# Altium PCB lk_motor_0310.PcbDoc
Units mm, origin at the board's own origin, x right, y up, seen from the top; angles counter-clockwise.
Board outline 16.3 x 14.9 mm, 2 copper layers (Top Layer, Bottom Layer); 17 components, 26 nets, 91 pads, 50 vias.
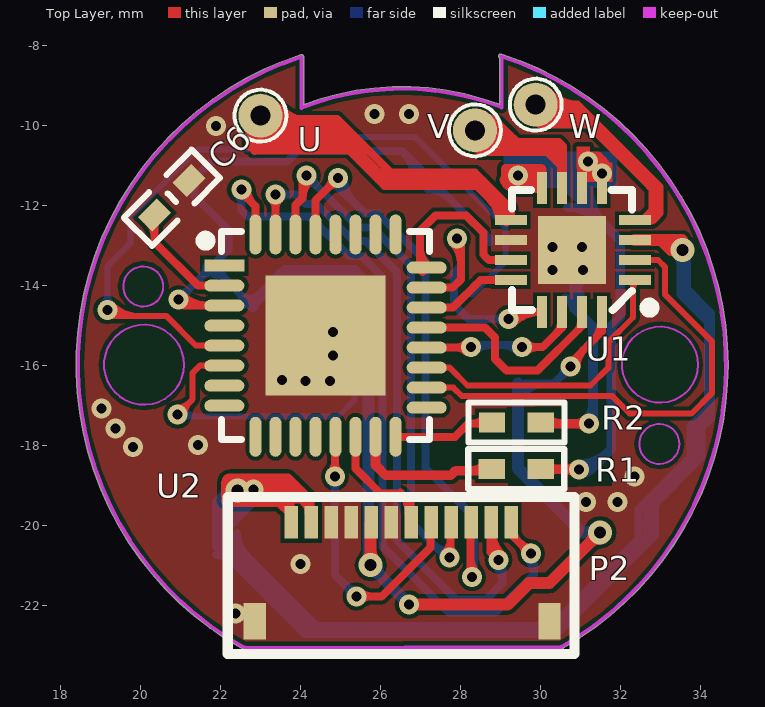
[diagram p0: Top Layer view]
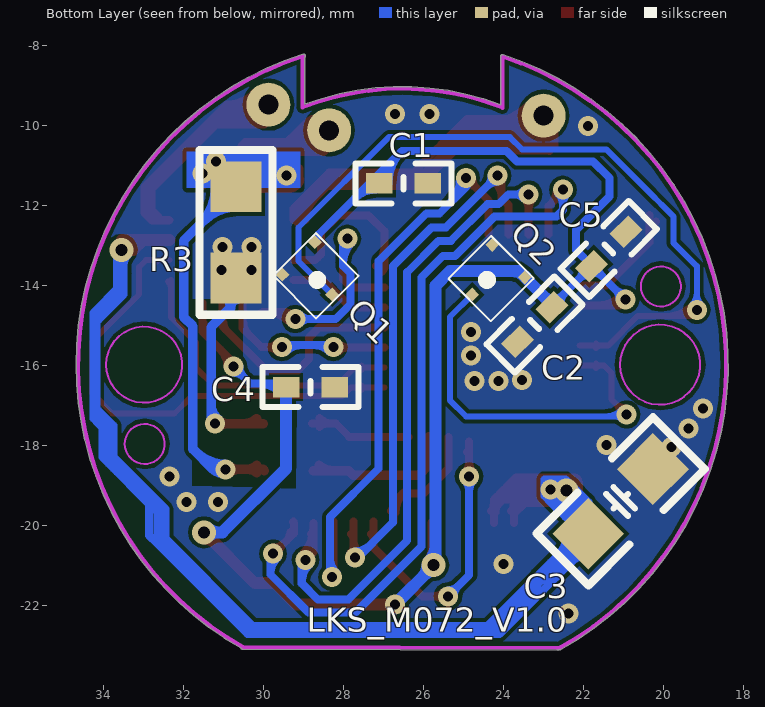
[diagram p1: Bottom Layer view, seen from below]
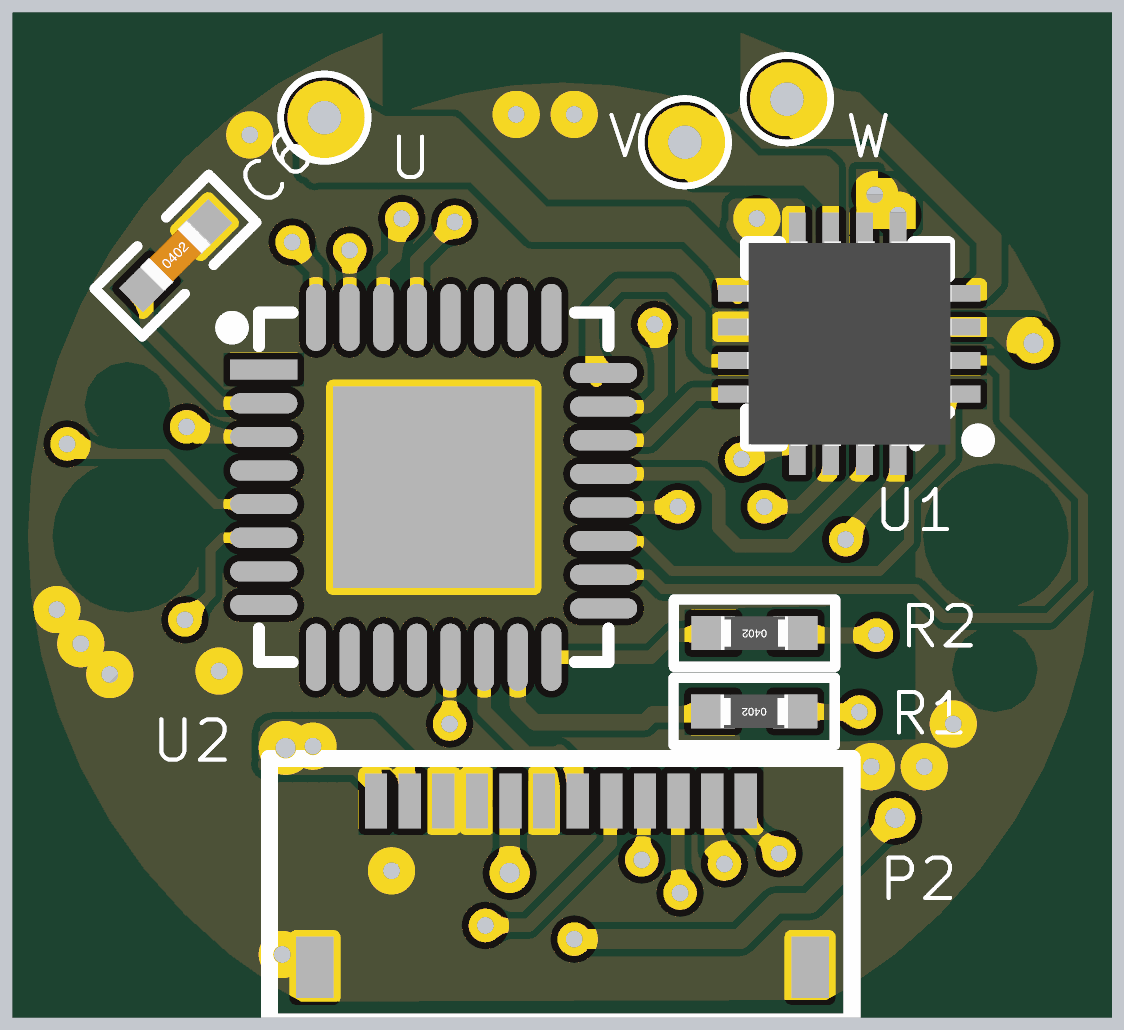
[diagram p2: 3D render of the assembled board from above, using the file's embedded part models]
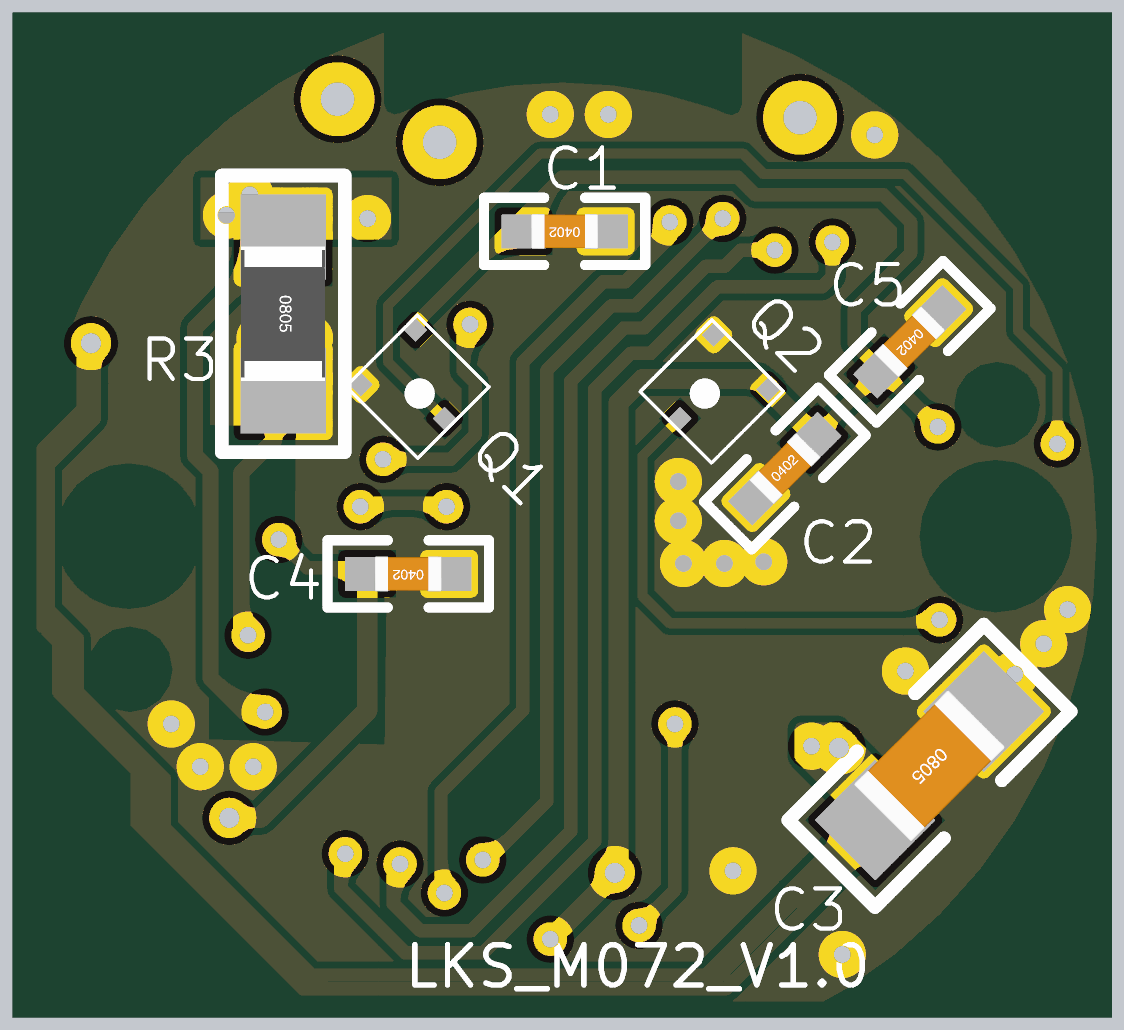
[diagram p3: 3D render of the assembled board from below, using the file's embedded part models]

## Layer stack, top to bottom
Top Solder: solder mask 0.0102, Solder Resist, Dk 3.5
Top Layer: signal copper 0.0356
Dielectric1: dielectric 0.32, FR-4, Dk 4.8
Bottom Layer: signal copper 0.0356
Bottom Solder: solder mask 0.0102, Solder Resist, Dk 3.5

## Board outline
22.576,-23.097 ccw(c22.601,-23.052) 22.621,-23.099 ccw(c22.657,-23.063) 22.657,-23.114 30.531,-23.088 ccw(c30.531,-23.038) 30.577,-23.059 ccw(c26.543,-15.977) 34.693,-15.977 ccw(c26.543,-15.977) 29.027,-8.214 ccw(c29.011,-8.262) 28.982,-8.303 28.982,-9.468 ccw(c26.543,-15.977) 24.081,-9.477 24.081,-8.276 ccw(c24.031,-8.276) 24.015,-8.228 ccw(c26.543,-15.977)

## Design rules (kind name [scope] priority, off if disabled: settings)
Clearance Clearance_2 [(InPoly)] p1: gap=0.1 ignorepadtopadclearanceinfootprint=FALSE except(0: Arc-Hole Track-Hole SMDPad-Hole THPad-Hole Via-Hole Fill-Hole Poly-Hole Region-Hole Text-Hole)
Clearance [All] p2: gap=0.1 ignorepadtopadclearanceinfootprint=FALSE except(0: Arc-Hole Track-Hole SMDPad-Hole THPad-Hole Via-Hole Fill-Hole Poly-Hole Region-Hole Text-Hole)
ComponentClearance [All] p1 off: gap=0.254 collisioncheckmode=3 verticalgap=0.127 showdistances=FALSE
FabricationTestpoint [(IsPad And (OnTopLayer Or OnBottomLayer))] p1: side=3 testpointundercomponent=TRUE minsize=1.016 maxsize=2.54 preferedsize=1.524 minholesize=0 maxholesize=1.016 preferedholesize=0.813 testpointgrid=0.025 allowsidetop=TRUE allowsidebottom=TRUE usegrid=TRUE gridtolerance=0
HoleSize [All] p1: absolutevalues=TRUE maxlimit=5.08 minlimit=0.025 maxpercent=80.000 minpercent=20.000
HoleToHoleClearance [All] p1: gap=0.127 allowstackedmicrovias=TRUE
MinimumSolderMaskSliver [All] p1 off: minsoldermaskwidth=0.127
PlaneClearance [All] p1: clearance=0.178
PolygonConnect PolygonConnect_1 [IsPad] p1: connectstyle=Direct reliefconductorwidth=0.508 reliefentries=4 polygonreliefangle="90 Angle" airgapwidth=0.254
PolygonConnect [All] p2: connectstyle=Direct reliefconductorwidth=0.508 reliefentries=4 polygonreliefangle="90 Angle" airgapwidth=0.254
RoutingVias [All] p1: holewidth=0.457 width=0.762 viastyle="Through Hole" minholewidth=0.2 minwidth=0.5 maxholewidth=1 maxwidth=2
SilkToSilkClearance [All] p1 off: silktosilkclearance=0.127
SilkToSolderMaskClearance SilkscreenOverComponentPads [IsPad] p1 off: minsilkscreentomaskgap=0.127 clearancetoexposedcopper=TRUE
SolderMaskExpansion [All] p1: expansion=0.102 istentingtop=FALSE
Width [All] p1: maxlimit=2.54 minlimit=0.127 preferedwidth=0.203
22 further rules are at their usual default settings.

## Components (designator, comment, footprint, x,y, rotation, side; value= is the part's Value field where it differs from the comment)
C1 "1uF/10V" "C 0402_M" 26.507,-11.443 r0 bottom
C2 "104F/10V" "C 0402_M" 23.231,-14.971 r135 bottom
C3 "22uF/16V" "C 0805_M" 21.079,-19.393 r315 bottom
C4 "104/10V" "C 0402_M" 28.834,-16.538 r0 bottom
C5 "10uF/10V" "C 0402_M" 21.374,-13.084 r315 bottom
C6 "100nF/50V" "C 0402_M" 20.79,-11.803 r45 top
P2 "Header 12" SMD-12 29.273,-19.916 r180 top
Q1 "MT9101DT" DFN1616 28.664,-13.855 r315 bottom locked
Q2 "MT9101DT" DFN1616 24.422,-13.855 r45 bottom locked
R1 "1K1%" "R 0402_M" 29.398,-18.583 r180 top
R2 "1K1%" "R 0402_M" 29.403,-17.419 r180 top
R3 "0.100R/0805" "R 0805_M" 30.693,-12.67 r270 bottom
U "HD" HD 23.005,-9.751 r90 top
U1 "MS39233" QFN16 30.787,-13.114 r180 top
U2 "LKS32MC072KBQ8" "QFN32 5X5_M" 24.63,-15.25 r270 top
V "HD" HD 28.367,-10.117 r90 top
W "HD" HD 29.886,-9.477 r90 top

## Footprints (in the part's own frame and the unit in brackets; to place one, negate y for a bottom-side part, rotate by r counter-clockwise, add the part's x,y. Pads: shape width x height; smd on the part's side, far side on the other; paste and mask are expansions set on the pad)
"C 0402_M" [mil] "无极性贴片电容"
  rect 26x20 smd: 1(-24,0) 2(24,0)
  silkscreen extent -47,-20 47,20, body extent -20,-10 20,10, height 21
"C 0805_M" [mil] "无极性贴片电容"
  rect 50x50 smd: 1(-45,0) 2(45,0)
  silkscreen extent -81,-36 81,36, body extent -39,-24 39,24, height 20
DFN1616 [mm]
  rect 0.25x0.25 smd: 1(-0.625,-0.711) 2(0.525,-0.711) 3(0,0.525)
  silkscreen extent -0.8,-0.85 0.7,0.66
HD [mm]
  round 1.1 hole 0.5: 1(0,0)
  silkscreen extent -0.65,-0.65 0.65,0.65
QFN16 [mm] "3mm*3mm"
  rect 0.8x0.25 smd: 1(-1.575,0.75) 2(-1.575,0.25) 3(-1.575,-0.25) 4(-1.575,-0.75) 9(1.524,-0.75) 10(1.524,-0.25) 11(1.524,0.25) 12(1.524,0.75)
  rect 0.25x0.8 smd: 5(-0.75,-1.55) 6(-0.25,-1.55) 7(0.25,-1.55) 8(0.75,-1.55) 13(0.75,1.55) 14(0.25,1.55) 15(-0.25,1.55) 16(-0.75,1.55)
  rect 1.7x1.7 smd: 17(0,0)
  silkscreen extent -2.07,-1.5 1.5,1.56, body extent -1.55,-1.52 1.49,1.52, height 0.9
"QFN32 5X5_M" [mm] "32脚，长x宽x高：5x5x0.95mm，脚距：0.5mm"
  rect 3x3 smd: 0(0,0)
  rect 0.3x1 smd: 1(-1.751,-2.528)
  oval 0.3x1 smd: 2(-1.25,-2.528) 3(-0.75,-2.528) 4(-0.25,-2.528) 5(0.25,-2.528) 6(0.75,-2.528) 7(1.25,-2.528) 8(1.75,-2.528) 17(1.8,2.528) 18(1.3,2.528) 19(0.8,2.528) 20(0.3,2.528) 21(-0.2,2.528) 22(-0.7,2.528) 23(-1.2,2.528) 24(-1.7,2.528)
  oval 1x0.3 smd: 9(2.528,-1.75) 10(2.528,-1.25) 11(2.528,-0.75) 12(2.528,-0.25) 13(2.528,0.25) 14(2.528,0.75) 15(2.528,1.25) 16(2.528,1.75) 25(-2.528,1.75) 26(-2.528,1.25) 27(-2.528,0.75) 28(-2.528,0.25) 29(-2.528,-0.25) 30(-2.528,-0.75) 31(-2.528,-1.25) 32(-2.528,-1.75)
  silkscreen extent -2.6,-3.12 2.6,2.6
"R 0402_M" [mil] "1/16W贴片电阻"
  rect 26x20 smd: 1(-24,0) 2(24,0)
  silkscreen extent -47,-20 47,20, body extent -20,-10 20,10, height 12
"R 0805_M" [mil] "1/8W贴片电阻"
  rect 50x50 smd: 1(-45,0) 2(45,0)
  silkscreen extent -81,-36 81,36, body extent -39,-25 39,25, height 20
SMD-12 [mil]
  rect 22x36 smd: 0(252.38,97.5) 0/2(-37.62,97.5)
  rect 13x32 smd: 1(216.53,0) 2(196.85,0) 3(177.17,0) 4(157.48,0) 5(137.79,0) 6(118.11,0) 7(98.43,0) 8(78.74,0) 9(59.05,0) 10(39.37,0) 11(19.68,0) 12(0,0)
  silkscreen extent -62,-25 279,130

## Part data
C1 C2 C3 C4 C5 C6: library part C, "Capacitor"
P2: "Header, 12-Pin"
R1 R2: library part Res, "Resistor"
R3: library part RES2短
U2: library part LKS32MC072KBQ82, "LKS32MC072KBQ8 / 凌鸥创芯，128KFlash，12KRAM"

## Via types
v1: diameter 0.5, hole 0.25, Top Layer to Bottom Layer, 46 vias
v2: diameter 0.6, hole 0.3, Top Layer to Bottom Layer, 4 vias

## Nets (pads, with @x,y where several pads share a name; then routed paths per layer and width w, separated by ;. In a path a pad name is that pad's centre, name@x,y a point inside that pad or via, vN(x,y) a via of type N, cw(c..) or ccw(c..) an arc to the next point about the centre after c; other vN are vias at no path point)
3.3V: C1.2 C2.2 C4.2 C5.2 P2.5 Q1.1 Q2.1 U1.16 U2.3 | length 53.5
  Top Layer w0.2: v1@20.92,-14.386 ccw(c21.194,-14.112) 21.194,-14.5 ; v1(20.955,-14.351) 21.104,-14.5 U2.3 ; v1@21.061,-14.245 ccw(c21.677,-13.629) U2.3@21.677,-14.5 ; v1(30.759,-16.027) 30.759,-15.926 31.537,-15.148 U1.16@31.537,-14.435 ; v1@30.909,-16.027 cw(c31.517,-16.027) 31.087,-15.598 ; 31.347,-15.338 ccw(c30.947,-14.939) U1.16@31.512,-14.939
  Top Layer w0.3: v2@25.655,-20.88 ccw(c25.399,-20.623) 25.761,-20.623 ccw(c26.123,-20.623) v2@25.867,-20.88 ; v2(25.761,-20.986) P2.5@25.761,-19.931 ; v1(26.721,-21.971) 29.185,-21.971 29.718,-21.438 30.226,-21.438 v2(31.496,-20.168) ; v2@31.346,-20.168 cw(c30.984,-20.168) 31.24,-20.424 cw(c31.496,-20.68) v2@31.496,-20.318
  Bottom Layer w0.2: v1(20.955,-14.351) C5.2@21.791,-13.515 ; v1@20.955,-14.201 ccw(c20.955,-13.839) 21.211,-14.095 ccw(c21.467,-14.351) v1@21.105,-14.351 ; 21.519,-13.787 cw(c21.805,-14.074) C5.2@21.805,-13.669 ; 21.552,-13.754 ccw(c21.313,-13.515) C5.2@21.651,-13.515 ; C5.2@21.859,-13.722 cw(c21.859,-14.094) 22.122,-13.831 cw(c22.385,-13.568) C5.2@22.013,-13.568 ; 22.34,-10.897 22.784,-10.897 ; 22.461,-14.171 cw(c22.147,-14.486) C2.2@22.592,-14.486 ; 22.535,-14.244 ccw(c22.746,-14.034) C2.2@22.746,-14.332 ; C2.2 22.8,-14.509 C5.2 C5.2@21.791,-13.515 ; v2@25.705,-20.955 v2@25.761,-21.011 ; 26.557,-10.646 cw(c25.761,-11.443) C1.2@26.887,-11.443 ; 26.898,-10.988 cw(c26.444,-11.443) C1.2@27.087,-11.443 ; C1.2@27.193,-11.597 cw(c27.193,-12.355) 27.729,-11.819 ; 28.615,-12.704 cw(c28.409,-12.91) Q1.1@28.7,-12.91 ; Q1.1 28.725,-12.815 26.548,-10.638 23.932,-10.638 23.673,-10.897 22.784,-10.897 ; C4.2@29.588,-16.538 C4.2@29.677,-16.449 ; C4.2@29.629,-16.647 cw(c30.106,-17.124) 30.106,-16.449 ; C4.2@29.634,-16.449 C4.2@29.677,-16.449 ; v1@30.609,-16.027 cw(c30.247,-16.027) 30.503,-16.283 cw(c30.759,-16.54) v1@30.759,-16.177 ; v1(30.759,-16.027) 30.338,-16.449 C4.2@29.677,-16.449 ; C5.2@21.791,-13.515 22.2,-13.106 22.2,-12.607 21.361,-11.769 21.361,-11.303 21.768,-10.897 22.784,-10.897
  Bottom Layer w0.3: C2.2@22.746,-14.382 ccw(c22.746,-14.036) 22.991,-14.28 ; C2.2@22.8,-14.509 22.8,-14.471 Q2.1 23.631,-13.64 25.349,-13.64 25.705,-13.995 v2@25.705,-20.955 ; Q2.1@23.459,-13.777 cw(c23.79,-14.107) 23.79,-13.64 ; 25.705,-20.488 ccw(c26.258,-20.488) v2@25.867,-20.88 ; v2@25.761,-21.136 cw(c25.761,-21.436) 25.974,-21.224 ; v2(25.761,-20.986) 25.761,-21.011 v1(26.721,-21.971) ; v2@25.911,-20.986 ccw(c26.334,-20.986) 26.035,-21.285 ; 29.444,-18.217 29.444,-17.907 ; C4.2@29.444,-16.449 29.444,-17.907 ; v2@31.39,-20.274 ccw(c31.134,-20.53) 31.134,-20.168 ccw(c31.134,-19.805) v2@31.39,-20.062 ; v2(31.496,-20.168) 31.039,-20.168 29.444,-18.572 29.444,-17.907
A_N: U1.13 U2.23 | length 9.1
  Top Layer w0.2: U2.23@26.988,-14.05 U2.23 27.809,-14.05 28.016,-13.843 28.016,-12.929 v1(27.915,-12.827) ; v1@27.809,-12.933 cw(c27.307,-13.434) 28.016,-13.434 ; v1@29.175,-14.798 cw(c29.5,-15.123) 29.5,-14.664 ; v1(29.21,-14.834) 29.286,-14.834 29.456,-14.664 U1.13 ; v1@29.316,-14.94 cw(c29.982,-15.606) U1.13@29.982,-14.664
  Bottom Layer w0.2: v1@27.809,-12.933 cw(c27.307,-13.434) 28.016,-13.434 ; v1(27.915,-12.827) 28.016,-12.929 28.016,-13.513 27.839,-13.69 27.839,-14.47 28.203,-14.834 v1(29.21,-14.834) ; v1@29.104,-14.94 ccw(c28.848,-15.196) 28.848,-14.834 ccw(c28.848,-14.471) v1@29.104,-14.728
A_P: U1.12 U2.22 | length 2.8
  Top Layer w0.2: U2.22@26.988,-14.55 U2.22 27.817,-14.55 28.503,-13.864 ; 28.334,-14.034 28.503,-13.864 ; U1.12 28.503,-13.864
B_N: U1.15 U2.21 | length 6
  Top Layer w0.2: U2.21@26.988,-15.05 U2.21 28.62,-15.05 28.868,-15.298 28.868,-15.838 29.152,-16.122 29.928,-16.122 31.037,-15.013 U1.15@31.037,-14.435 ; 30.942,-15.108 ccw(c30.773,-14.939) U1.15@31.012,-14.939
B_P: U1.14 U2.20 | length 6.7
  Top Layer w0.2: U2.20@26.988,-15.55 U2.20 28.084,-15.55 28.112,-15.578 v1@28.112,-15.64 ; 27.874,-15.55 ccw(c27.874,-15.149) v1@28.158,-15.433 ; 27.93,-15.55 cw(c27.93,-15.873) v1@28.158,-15.645 ; v1(29.546,-15.539) 30.054,-15.539 30.537,-15.056 U1.14@30.537,-14.435 ; v1@29.652,-15.645 cw(c29.908,-15.901) 29.908,-15.539 cw(c29.908,-15.177) v1@29.652,-15.433 ; 30.412,-15.181 ccw(c30.169,-14.939) U1.14@30.512,-14.939
  Bottom Layer w0.2: v1@28.213,-15.64 28.366,-15.488 29.496,-15.488 v1(29.546,-15.539) ; v1@28.37,-15.645 cw(c28.749,-16.023) 28.749,-15.488 ; 29.062,-15.488 cw(c29.062,-16.023) v1@29.44,-15.645
  other v1: 28.264,-15.539
C_N: U1.1 U2.19 | length 8
  Top Layer w0.15: U2.19@26.988,-16.05 U2.19 27.734,-16.05 28.181,-16.497 31.255,-16.497 31.699,-16.053 31.699,-15.418 32.319,-14.798 U1.1@32.319,-13.864 ; U2.19@27.562,-16.103 cw(c27.69,-16.231) 27.69,-16.05 cw(c27.69,-15.869) U2.19@27.562,-15.997 ; 32.319,-14.089 cw(c32.587,-14.089) U1.1@32.398,-13.899
C_P: U1.2 U2.18 | length 13.4
  Top Layer w0.15: U2.18@26.988,-16.55 U2.18 27.828,-16.55 28.042,-16.764 31.801,-16.764 32.233,-17.196 33.782,-17.196 34.29,-16.688 34.29,-15.392 33.122,-14.224 ; U2.18@27.562,-16.604 cw(c27.69,-16.732) 27.69,-16.55 cw(c27.69,-16.369) U2.18@27.562,-16.497 ; U1.2 32.366,-13.36 32.944,-13.36 33.122,-13.538 ; U1.2@32.673,-13.399 cw(c32.767,-13.493) 32.767,-13.36 ; 33.122,-14.072 33.122,-13.538 ; 33.274,-14.376 33.122,-14.224 ; 33.122,-14.224 33.122,-13.538
FAULT: U1.11 U2.24 | length 5
  Top Layer w0.2: U2.24@26.988,-13.55 26.988,-12.636 27.381,-12.243 28.143,-12.243 28.575,-12.675 28.575,-13.22 ; U2.24@26.988,-13.501 ccw(c27.207,-13.501) U2.24@27.052,-13.656 ; 26.988,-13.018 ccw(c27.69,-13.018) U2.24@27.194,-13.514 ; 28.645,-13.29 28.575,-13.22 ; U1.11 28.719,-13.364 28.575,-13.22
GND: C1.1 C2.1 C3.1 C4.1 C5.1 C6.2 P2.0 P2.0/2 P2.3 P2.4 P2.6 Q1.2 Q2.2 R2.1 R3.2 U1.10 U1.17 U2.0 | length 8.6
  Top Layer w0.24: R2.1@30.013,-17.452 31.214,-17.452 v1(31.217,-17.45) ; R2.1@30.184,-17.325 ccw(c30.492,-17.016) 30.492,-17.452 ; 30.897,-17.452 ccw(c30.897,-17.13) v1@31.125,-17.358 ; 30.909,-17.452 cw(c30.909,-17.758) v1@31.125,-17.542
  Bottom Layer w0.24: R3.2@30.622,-14.323 cw(c30.589,-14.565) 30.833,-14.565 cw(c31.26,-14.565) R3.2@31.003,-14.224 ; 30.833,-14.486 cw(c31.936,-14.486) R3.2@31.156,-13.706 ; R3.2@30.833,-13.907 cw(c31.357,-13.907) R3.2@30.986,-13.537 ; R3.2@30.833,-13.589 30.833,-14.552 31.318,-15.037 31.318,-16.967 ; v1@31.135,-17.348 ccw(c30.83,-16.967) 31.318,-16.967 ; v1(31.217,-17.45) 31.318,-17.348 31.318,-16.967
  other v1: 22.377,-22.2 24.003,-20.955 31.14,-19.406 31.928,-19.406 32.36,-18.771 19.812,-18.034 21.438,-17.983 19.38,-17.577 19.025,-17.069 24.13,-16.383 24.74,-16.383 23.546,-16.358 24.816,-15.748 24.816,-15.164 30.302,-13.614 31.064,-13.614 30.302,-13.03 31.039,-13.03 21.895,-10.008 25.857,-9.703 26.721,-9.703
LH_OUT_0: Q1.3 U2.5 | length 21.8
  Top Layer w0.15: v1(19.177,-14.605) 19.329,-14.757 20.65,-14.757 21.393,-15.5 U2.5 ; v1@19.195,-14.587 ccw(c19.605,-14.177) 19.605,-14.757 ; v1@19.301,-14.481 ccw(c19.967,-13.815) 19.967,-14.757 ; U2.5@21.699,-15.553 ccw(c21.571,-15.681) 21.571,-15.5 ccw(c21.571,-15.319) U2.5@21.699,-15.447
  Bottom Layer w0.15: v1@19.053,-14.481 ccw(c18.755,-14.183) 19.177,-14.183 ccw(c19.599,-14.183) v1@19.301,-14.481 ; v1(19.177,-14.605) 19.177,-13.818 19.177,-13.513 19.761,-12.929 19.761,-12.268 20.396,-11.633 20.218,-11.811 21.285,-10.744 ; 21.228,-10.801 21.438,-10.592 23.546,-10.592 23.851,-10.287 26.873,-10.287 29.134,-12.548 29.134,-13.386 Q1.3
LH_OUT_1: Q2.3 U2.6 | length 11.3
  Top Layer w0.15: v1@20.879,-17.272 21.311,-16.84 21.311,-16.18 21.49,-16 U2.6 ; v1@20.93,-17.046 ccw(c20.93,-16.624) 21.228,-16.922 ccw(c21.527,-17.221) v1@21.105,-17.221 ; U2.6@21.699,-16.053 ccw(c21.571,-16.181) 21.571,-16 ccw(c21.571,-15.819) U2.6@21.699,-15.947
  Bottom Layer w0.15: v1@20.879,-17.272 24.943,-17.272 25.349,-16.866 25.349,-14.783 Q2.3 ; v1@21.053,-17.345 cw(c21.229,-17.521) 21.229,-17.272 ; v1@21.053,-17.097 ccw(c21.475,-16.676) 21.475,-17.272
  other v1: 20.93,-17.221
NRST: C6.1 U2.2 | length 3.3
  Top Layer w0.2: C6.1@20.196,-12.397 cw(c19.803,-12.79) 20.359,-12.79 ; C6.1 20.359,-12.917 21.442,-14 U2.2
OC: U2.12
OPA3_IN: R2.2 U2.16 | length 3.1
  Top Layer w0.2: U2.16 27.866,-17.778 28.191,-17.452 R2.2@28.793,-17.452 ; 28.266,-17.452 ccw(c28.266,-16.968) R2.2@28.608,-17.31 ; 28.425,-17.452 cw(c28.425,-17.711) R2.2@28.608,-17.528
OPA3_IP: R1.2 U2.15 | length 4.1
  Top Layer w0.24: U2.15 25.881,-18.489 26.137,-18.745 27.762,-18.745 27.882,-18.626 R1.2@28.768,-18.626 ; 28.284,-18.626 ccw(c28.284,-18.155) R1.2@28.617,-18.488
PGND: R1.1 R3.1 U1.5 U1.6 U1.8 | length 27.1
  Top Layer w0.24: 29.104,-11.355 ccw(c29.387,-11.268) 29.387,-11.564 ; v1@29.333,-11.285 ccw(c29.712,-11.168) 29.712,-11.564 ; v1@29.439,-11.142 cw(c29.439,-11.568) 29.74,-11.267 ; v1@29.506,-11.074 cw(c29.506,-11.821) 30.034,-11.293 ccw(c29.541,-11.785) v1@29.541,-11.089 ; v1@29.541,-11.332 cw(c30.037,-11.717) 30.037,-11.089 ; v1@29.546,-11.326 cw(c30.023,-11.653) 30.023,-11.074 ; v1@29.563,-11.214 ccw(c30.037,-11.068) U1.8 ; v1@29.649,-11.176 U1.8 ; 29.82,-11.176 30.037,-11.394 U1.8 ; 29.872,-11.228 ccw(c30.012,-11.088) U1.8@30.037,-11.284 ; R1.1@29.987,-18.626 30.02,-18.593 v1(30.963,-18.593) ; R1.1@30.179,-18.677 cw(c30.383,-18.882) 30.383,-18.593 ; R1.1@30.179,-18.488 ccw(c30.432,-18.235) 30.432,-18.593 ; v1@30.871,-18.685 ccw(c30.649,-18.907) 30.649,-18.593 ccw(c30.649,-18.279) v1@30.871,-18.501 ; U1.6@31.037,-11.51 cw(c31.713,-11.51) v1@31.275,-10.996 ; U1.6@31.037,-11.491 31.037,-10.873 31.14,-10.77 31.445,-10.77 31.537,-10.862 U1.5@31.537,-11.491 ; 31.555,-10.88 cw(c31.306,-11.129) U1.5@31.642,-11.234 ; 29.134,-11.074 30.023,-11.074 ; 29.134,-11.074 29.148,-11.089 v1@29.424,-11.089 ; 29.134,-11.074 29.134,-11.303 29.395,-11.564 ; v1@29.337,-11.176 v1@29.424,-11.089 ; v1@29.337,-11.176 29.312,-11.176 29.312,-11.481 29.395,-11.564 ; v1@29.337,-11.176 29.725,-11.564 U1.8 ; 29.395,-11.564 U1.8 ; v1@29.424,-11.089 30.037,-11.089 ; 30.023,-11.074 30.037,-11.089 ; U1.8 30.037,-11.089
  Bottom Layer w0.24: R3.1@30.653,-11.527 32.004,-12.878 32.004,-14.783 31.775,-15.011 31.775,-18.085 31.267,-18.593 v1(30.963,-18.593) ; R3.1@30.693,-12.042 cw(c30.693,-13.187) 31.503,-12.377 ; v1@30.963,-18.703 ccw(c30.963,-18.233) 31.295,-18.565 ; v1@30.963,-18.463 ccw(c30.963,-17.413) 31.705,-18.155 ; R3.1@30.968,-11.527 ccw(c31.73,-11.527) R3.1@31.192,-12.065 ; R3.1@31.208,-11.527 ccw(c32.55,-11.527) 31.601,-12.475
  other v1: 29.439,-11.252 31.537,-11.201 31.191,-10.897
RXD0: P2.8 U2.13 | length 9.8
  Top Layer w0.2: v1@24.761,-18.665 ccw(c24.504,-18.408) 24.867,-18.408 ccw(c25.229,-18.408) v1@24.973,-18.665 ; v1@24.816,-18.72 v1(24.867,-18.771) U2.13@24.867,-17.894 ; 24.867,-18.282 cw(c25.035,-18.282) U2.13@24.916,-18.164 ; v1(25.4,-21.768) 26.035,-21.768 27.258,-20.545 P2.8@27.258,-19.896 ; v1@25.506,-21.874 cw(c25.762,-22.13) 25.762,-21.768 cw(c25.762,-21.406) v1@25.506,-21.662 ; 27.258,-20.351 cw(c27.467,-20.351) P2.8@27.32,-20.203
  Bottom Layer w0.2: v1@24.761,-18.877 cw(c24.504,-19.133) 24.867,-19.133 cw(c25.229,-19.133) v1@24.973,-18.877 ; v1(24.867,-18.771) 24.867,-21.234 v1(25.4,-21.768) ; v1@25.25,-21.768 ccw(c24.888,-21.768) 25.144,-21.512 ccw(c25.4,-21.256) v1@25.4,-21.618
SWCLK: P2.11 U2.31 | length 19.8
  Top Layer w0.2: v1@23.274,-11.828 cw(c23.018,-12.084) 23.38,-12.084 cw(c23.742,-12.084) v1@23.486,-11.828 ; U2.31 v1(23.38,-11.721) ; 28.758,-20.497 ccw(c29.313,-20.497) v1@28.921,-20.889 ; 28.758,-20.351 cw(c28.967,-20.351) P2.11@28.82,-20.203 ; P2.11@28.758,-20.014 ccw(c29.796,-20.014) v1@29.062,-20.747 ; P2.11@28.758,-19.931 28.758,-20.656 v1(28.956,-20.853)
  Bottom Layer w0.2: v1@23.456,-11.645 v1(23.38,-11.721) 23.888,-11.721 24.13,-11.963 24.409,-11.963 25.326,-12.88 25.63,-12.88 26.416,-13.665 26.416,-20.371 27.889,-21.844 28.651,-21.844 29.058,-21.438 29.058,-20.955 v1(28.956,-20.853) ; v1@23.486,-11.828 cw(c23.742,-12.084) 23.742,-11.721 cw(c23.742,-11.359) v1@23.486,-11.615 ; v1@28.852,-20.961 cw(c28.383,-21.446) 29.058,-21.446
SWDIO: P2.12 U2.32 | length 22.2
  Top Layer w0.2: v1@22.524,-11.752 cw(c22.524,-11.979) 22.684,-11.819 ; v1@22.524,-11.526 v1(22.524,-11.602) 22.524,-11.659 22.88,-12.014 U2.32 ; v1@22.674,-11.602 ccw(c23.172,-11.602) 22.82,-11.954 ; P2.12@29.251,-19.931 29.251,-20.193 29.759,-20.701 v1(29.769,-20.701) ; P2.12@29.258,-19.896 P2.12@29.272,-19.91 ; P2.12@29.339,-20.157 ccw(c29.637,-20.157) 29.426,-20.368 ; 29.495,-20.438 ccw(c29.769,-20.164) v1@29.769,-20.551 ; 29.52,-20.462 cw(c29.281,-20.701) v1@29.619,-20.701
  Bottom Layer w0.2: v1@22.418,-11.708 cw(c22.162,-11.964) 22.524,-11.964 cw(c22.886,-11.964) v1@22.63,-11.708 ; v1@22.601,-11.526 v1@22.575,-11.526 ; 23.216,-12.268 23.52,-12.268 ; v1@29.664,-20.808 cw(c29.259,-21.221) 29.837,-21.221 ; v1(29.769,-20.701) 29.837,-20.77 29.837,-21.217 28.88,-22.174 27.711,-22.174 26.06,-20.523 26.06,-13.792 25.527,-13.259 25.222,-13.259 24.232,-12.268 23.52,-12.268 ; v1@22.524,-11.577 22.524,-11.526 v1@22.575,-11.526 ; v1@22.524,-11.577 v1(22.524,-11.602) 22.524,-12.11 22.682,-12.268 23.52,-12.268 ; v1@22.524,-11.577 v1@22.575,-11.526
TIM1_CH0: P2.10 U2.29 | length 17.6
  Top Layer w0.2: U2.29 24.38,-11.865 v1(24.943,-11.303) ; v1@24.793,-11.303 cw(c24.431,-11.303) 24.687,-11.559 cw(c24.943,-11.815) v1@24.943,-11.453 ; v1@28.19,-21.179 ccw(c28.017,-21.007) 28.261,-21.007 ; P2.10@28.258,-19.896 28.26,-19.931 P2.10@28.261,-19.939 ; 28.261,-20.839 ccw(c28.742,-20.839) v1@28.402,-21.179 ; 28.261,-20.345 cw(c28.461,-20.345) P2.10@28.32,-20.203 ; P2.10@28.261,-19.931 P2.10@28.261,-19.939 ; v1@28.346,-21.387 28.261,-21.301 P2.10@28.261,-19.939
  Bottom Layer w0.2: v1@24.893,-11.303 ccw(c25.324,-11.303) 25.019,-11.608 ; v1@24.93,-11.316 24.93,-11.519 25.604,-12.193 25.934,-12.193 27.127,-13.386 27.127,-18.567 28.346,-19.787 v1@28.346,-21.387 ; v1@25.093,-11.303 ccw(c26.007,-11.303) 25.361,-11.949 ; v1@28.19,-21.179 ccw(c27.811,-20.8) 28.346,-20.8
  other v1: 28.296,-21.285
TIM1_CH1: P2.9 U2.30 | length 16.3
  Top Layer w0.2: U2.30 23.88,-11.985 24.054,-11.811 24.054,-11.354 v1(24.155,-11.252) ; v1@24.038,-11.167 24.045,-11.167 v1@24.054,-11.176 ; 24.054,-11.82 cw(c24.671,-11.82) v1@24.256,-11.363 ; v1@27.619,-20.687 ccw(c27.284,-20.351) 27.758,-20.351 cw(c27.967,-20.351) P2.9@27.82,-20.203 ; v1@27.758,-20.879 P2.9@27.758,-19.896 ; 27.758,-20.51 ccw(c28.008,-20.51) v1@27.831,-20.687
  Bottom Layer w0.2: v1@24.155,-11.402 cw(c24.155,-11.764) 24.411,-11.508 cw(c24.668,-11.252) v1@24.305,-11.252 ; v1(24.155,-11.252) 25.451,-12.548 25.806,-12.548 25.819,-12.56 26.772,-13.513 26.772,-19.918 27.774,-20.92 27.801,-20.92 27.813,-20.908 v1@27.813,-20.879 ; 27.335,-20.481 ccw(c27.725,-20.091) v1@27.725,-20.643
  other v1: 27.725,-20.793
TXD0: P2.7 U2.14 | length 4.1
  Top Layer w0.2: U2.14 25.381,-18.573 26.01,-19.202 26.53,-19.202 26.758,-19.431 P2.7@26.758,-19.896 ; 26.501,-19.173 cw(c25.999,-19.675) P2.7@26.708,-19.675 ; 26.644,-19.317 cw(c26.424,-19.536) P2.7@26.713,-19.651 ; 26.758,-19.481 ccw(c26.967,-19.481) P2.7@26.82,-19.629
U: U1.9 U.1 | length 51.7
  Top Layer w0.2: U.1@22.687,-10.069 cw(c22.268,-10.488) 22.86,-10.488 ; 22.733,-10.539 cw(c23.073,-10.539) U.1@23.044,-10.199 ; 22.733,-10.32 cw(c23.054,-10.32) U.1@23.027,-10 ; U.1@22.802,-10.153 cw(c22.635,-10.483) 23.005,-10.483 cw(c23.374,-10.483) U.1@23.208,-10.153 ; 22.86,-10.629 cw(c23.356,-10.629) U.1@23.172,-10.169 ; 22.86,-10.334 cw(c23.238,-10.334) U.1@23.098,-9.983 ; U.1@22.899,-9.857 ccw(c23.599,-9.157) 23.599,-10.147 ; U.1@23.379,-10.001 cw(c23.698,-10.213) 23.698,-9.83 ; U.1@23.416,-9.933 cw(c23.696,-10.056) 23.696,-9.751 ; U.1@23.416,-9.569 ccw(c23.696,-9.446) 23.696,-9.751 ; U.1@23.439,-9.632 ccw(c23.698,-9.561) 23.698,-9.83 ; 23.745,-10.008 cw(c23.745,-9.011) 23.04,-9.716 ccw(c24.082,-8.674) 24.082,-10.147 ; 24.228,-10.008 cw(c24.228,-8.528) 23.182,-9.574 ccw(c24.565,-8.191) 24.565,-10.147 ; 24.711,-10.008 cw(c24.711,-8.045) 23.323,-9.433 ccw(c25.048,-7.708) 25.048,-10.147 ; 24.714,-10.312 24.917,-10.312 25.959,-11.354 ; 25.095,-10.465 25.273,-10.465 26.162,-11.354 26.721,-11.354 ; 25.886,-11.078 25.984,-11.176 28.372,-11.176 28.55,-11.354 ; 28.751,-11.852 cw(c28.239,-12.364) U1.9@28.963,-12.364 ; 29.083,-12.11 cw(c28.871,-12.322) U1.9@29.153,-12.424 ; 29.092,-12.193 cw(c28.922,-12.364) U1.9@29.163,-12.364 ; 22.86,-10.617 22.86,-10.094 U.1@23.005,-9.949 ; 22.86,-10.617 22.733,-10.49 22.733,-10.023 U.1 ; 22.86,-10.617 23.47,-10.617 ; U.1@23.005,-9.949 U.1 ; U.1@23.005,-9.949 23.368,-10.312 25.4,-10.312 ; U.1 23.696,-9.751 ; U.1 23.005,-10.483 23.139,-10.617 23.47,-10.617 ; U.1 23.005,-10.229 23.241,-10.465 25.552,-10.465 ; U.1 23.084,-9.83 23.698,-9.83 ; U.1 23.401,-10.147 25.235,-10.147 ; U.1 23.261,-10.008 25.095,-10.008 25.235,-10.147 ; 23.47,-10.617 25.705,-10.617 ; 23.696,-9.751 23.774,-9.83 ; 23.698,-9.83 23.774,-9.83 ; 23.774,-9.83 24.917,-9.83 25.235,-10.147 ; 25.235,-10.147 25.4,-10.312 ; 25.4,-10.312 25.552,-10.465 ; 25.552,-10.465 25.705,-10.617 ; 25.705,-10.617 26.441,-11.354 ; 25.959,-11.354 26.108,-11.503 28.27,-11.503 ; 25.959,-11.354 26.441,-11.354 ; 26.441,-11.354 26.721,-11.354 ; 26.721,-11.354 28.327,-11.354 ; 28.27,-11.503 28.403,-11.503 U1.9 U1.9@29.263,-12.29 ; 28.27,-11.503 28.476,-11.503 ; 28.327,-11.354 28.55,-11.354 ; 28.327,-11.354 28.476,-11.503 ; 28.476,-11.503 29.035,-12.062 U1.9@29.263,-12.29 ; 28.55,-11.354 29.263,-12.067 U1.9@29.263,-12.29
V: U1.7 V.1 | length 25.9
  Top Layer w0.2: V.1@28.298,-9.774 cw(c28.448,-10.523) 28.988,-9.983 ; V.1@28.326,-9.972 cw(c28.53,-10.698) 29.063,-10.165 ; V.1@28.337,-10.27 28.59,-10.27 28.981,-10.661 ; V.1@28.337,-9.97 cw(c28.536,-10.963) 29.252,-10.247 ; V.1@28.377,-10.166 cw(c28.624,-11.403) 29.517,-10.511 ; V.1@28.38,-10.165 cw(c28.636,-11.076) 29.304,-10.407 ; V.1@28.382,-10.164 cw(c28.561,-10.729) 28.979,-10.31 ; V.1@28.442,-10.355 cw(c28.672,-11.083) 29.212,-10.543 ; V.1@28.6,-9.931 28.937,-9.931 29.667,-10.661 ; V.1@28.184,-10.117 28.369,-9.931 V.1@28.829,-9.931 ; V.1@28.184,-10.117 28.644,-10.117 V.1@28.829,-9.931 ; V.1@28.184,-10.117 28.184,-10.34 28.505,-10.661 29.21,-10.661 ; V.1@28.184,-10.117 28.786,-10.117 29.235,-10.566 ; V.1@28.184,-10.117 28.532,-10.117 28.981,-10.566 ; V.1@28.184,-10.117 28.728,-10.661 28.981,-10.661 ; V.1@28.184,-10.117 28.633,-10.566 28.981,-10.566 ; V.1@28.829,-9.931 29.464,-10.566 ; 28.981,-10.661 29.21,-10.661 ; 28.981,-10.566 29.108,-10.439 29.896,-10.439 ; 28.981,-10.566 29.235,-10.566 ; 29.21,-10.661 29.667,-10.661 ; 29.235,-10.566 29.464,-10.566 ; 29.464,-10.566 30.302,-10.566 30.429,-10.693 ; 29.667,-10.661 30.175,-10.661 30.537,-11.024 30.537,-11.491 30.537,-10.802 ; 29.896,-10.439 30.455,-10.439 30.537,-10.522 30.537,-10.802 ; 29.896,-10.439 30.175,-10.439 30.429,-10.693 ; 30.429,-10.693 30.537,-10.802
  Top Layer w0.25: 29.108,-10.439 30.455,-10.439 30.537,-10.522 U1.7@30.537,-11.491
VDD: C3.2 P2.1 P2.2 U1.3 | length 131
  Top Layer w0.2: 22.114,-19.374 ccw(c22.232,-19.282) 22.232,-19.431 ; 22.144,-18.845 cw(c22.261,-18.961) 22.261,-18.796 ; v2@22.271,-19.25 ccw(c22.645,-18.955) 22.645,-19.431 ; v2@22.286,-18.986 cw(c22.74,-19.435) 22.74,-18.796 ; v2@22.432,-19.123 cw(c22.69,-19.381) v1@22.857,-19.056 ; v2@22.464,-18.846 cw(c22.559,-18.912) 22.559,-18.796 ; 22.507,-18.796 cw(c22.507,-19.184) v1@22.883,-19.089 ; 22.523,-19.431 ccw(c22.523,-19.068) v1@22.884,-19.106 ; v2@22.534,-19.126 cw(c22.534,-19.402) v1@22.729,-19.207 ; v2@22.57,-19.267 cw(c23.698,-20.382) 23.698,-18.796 ; 22.586,-19.382 22.684,-19.382 ; v2@22.585,-19.002 ccw(c23.471,-18.301) 23.471,-19.431 ; v2@22.594,-19.169 ccw(c22.941,-19.07) 22.941,-19.431 ; v2@22.625,-18.929 cw(c22.822,-19.126) 22.949,-18.879 ; v2@22.628,-18.959 cw(c22.939,-19.172) 22.939,-18.796 ; v1@22.685,-19.085 cw(c22.301,-19.045) 22.301,-19.431 ; v1@22.689,-19.138 ccw(c22.25,-19.249) 22.25,-18.796 ; v1@22.725,-18.998 cw(c22.428,-18.718) v2(22.428,-19.126) ; 22.746,-19.431 ccw(c22.746,-19.091) 23.083,-19.127 ; v1@22.758,-19.177 23.851,-19.177 ; 22.764,-18.796 cw(c22.764,-19.119) 23.077,-19.039 ; v1@22.787,-19.115 ccw(c23.206,-18.995) 23.206,-19.431 ; v1@22.788,-19.177 ccw(c22.788,-19.486) v2@22.57,-19.268 ; v1@22.79,-19.124 ccw(c23.216,-18.902) 23.216,-19.382 ; v1@22.793,-19.073 cw(c23.318,-19.433) 23.318,-18.796 ; v1@22.796,-18.974 ccw(c22.796,-19.494) v2(22.428,-19.126) ; v1@22.799,-19.136 ccw(c23.312,-18.624) 23.312,-19.348 ; v1@22.958,-19.186 cw(c23.698,-19.693) 23.698,-18.796 ; v1@22.968,-19.031 ccw(c23.546,-18.73) 23.546,-19.382 ; v1@22.979,-19.06 ccw(c23.471,-18.919) 23.471,-19.431 ; v1@23.034,-19.177 cw(c23.034,-18.521) 22.57,-18.985 ccw(c22.911,-18.643) 22.911,-19.126 ccw(c22.911,-19.609) v2@22.57,-19.268 ; 23.058,-19.431 cw(c23.058,-18.628) v2(22.428,-19.126) ; v1@23.063,-19.177 23.851,-19.177 ; 23.135,-19.126 ccw(c23.135,-19.402) 22.941,-19.207 cw(c23.503,-19.77) 23.503,-18.974 ; 23.219,-18.796 ccw(c23.219,-19.908) v2(22.428,-19.126) ; 23.258,-19.126 cw(c23.258,-18.677) v1@22.941,-18.995 ; 23.279,-18.974 ccw(c23.279,-19.977) v2@22.57,-19.268 ; 23.563,-19.522 ccw(c23.774,-19.312) P2.1@23.774,-19.61 ; 23.616,-19.452 cw(c23.394,-19.675) P2.1@23.708,-19.675 ; P2.1@23.751,-19.931 P2.1@23.751,-19.71 ; 23.751,-19.462 ccw(c23.986,-19.462) P2.1@23.82,-19.629 ; 23.795,-19.348 cw(c23.795,-18.141) v1@22.941,-18.995 ; 24.109,-19.436 cw(c23.87,-19.675) P2.2@24.208,-19.675 ; P2.2@24.251,-19.931 P2.2@24.251,-19.577 ; 24.251,-19.462 ccw(c24.486,-19.462) P2.2@24.32,-19.629 ; 22.25,-18.796 23.698,-18.796 ; 22.25,-18.796 22.123,-18.923 22.123,-19.253 22.301,-19.431 ; 22.301,-19.431 23.471,-19.431 ; v2(22.428,-19.126) 24.028,-19.126 ; v2(22.428,-19.126) 22.684,-19.382 ; v2(22.428,-19.126) 22.581,-18.974 23.876,-18.974 ; 22.684,-19.382 22.835,-19.382 22.987,-19.382 ; v1@22.941,-18.995 ccw(c23.381,-18.555) 23.381,-19.177 cw(c23.381,-18.555) v1@22.941,-18.995 ; 22.987,-19.382 23.02,-19.348 24.022,-19.348 ; 22.987,-19.382 23.546,-19.382 ; 23.471,-19.431 P2.1@23.751,-19.71 ; 23.546,-19.382 P2.1@23.751,-19.587 ; 23.546,-19.382 23.751,-19.382 P2.1@23.751,-19.587 ; 23.698,-18.796 23.876,-18.974 ; P2.1@23.751,-19.71 P2.1@23.751,-19.587 ; 23.851,-19.177 24.079,-19.177 ; 23.851,-19.177 24.022,-19.348 ; 23.876,-18.974 24.028,-19.126 ; 24.022,-19.348 24.251,-19.348 ; 24.022,-19.348 P2.2@24.251,-19.577 ; 24.028,-19.126 24.079,-19.177 ; 24.079,-19.177 24.251,-19.348 ; P2.2@24.251,-19.577 24.251,-19.348
  Top Layer w0.3: U1.3 33.02,-12.864 ; v2@33.41,-13.151 ccw(c33.02,-13.273) 33.02,-12.864 ; 33.02,-12.864 33.262,-13.106 v2(33.553,-13.106) ; 33.02,-12.864 33.311,-12.864 ; 33.311,-12.864 33.542,-12.864 33.542,-13.095 v2(33.553,-13.106) ; 33.311,-12.864 v2(33.553,-13.106)
  Bottom Layer w0.2: C3.2@21.888,-20.336 cw(c21.888,-21.189) 22.491,-20.586 ; C3.2@22.002,-20.129 cw(c22.444,-19.85) 22.074,-19.48 ; C3.2@22.023,-20.201 ccw(c23.048,-20.201) 22.323,-20.926 ; 22.045,-19.255 cw(c22.366,-19.576) v2(22.428,-19.126) ; C3.2@22.066,-19.844 ccw(c21.59,-19.369) v2@22.236,-19.182 ; C3.2@22.171,-20.022 cw(c22.661,-19.713) v2@22.251,-19.303 ; v2@22.287,-19.268 cw(c21.945,-19.609) 22.428,-19.609 cw(c22.911,-19.609) v2@22.57,-19.268 ; 22.305,-19.605 ccw(c21.961,-19.261) v2(22.428,-19.126) ; 22.307,-20.91 ccw(c21.888,-21.329) C3.2@21.888,-20.736 ; C3.2@22.34,-19.916 cw(c22.878,-19.576) v2(22.428,-19.126) ; 22.451,-19.79 ccw(c21.871,-19.21) v1@22.686,-19.118 ; 22.631,-19.51 cw(c22.895,-19.51) v1@22.857,-19.249 ; v2@22.631,-19.278 cw(c22.861,-19.278) v1@22.827,-19.051 ; 22.647,-20.742 cw(c23.187,-20.201) C3.2@22.423,-20.201 ; 22.664,-21.267 cw(c23.731,-20.201) 22.223,-20.201 ccw(c23.031,-20.201) 22.46,-20.773 ccw(c21.888,-21.345) 21.888,-20.536 cw(c21.888,-21.872) 22.832,-20.927 ; 22.708,-19.38 ccw(c22.609,-19.282) v1@22.718,-19.195 ; 22.744,-19.496 ccw(c22.398,-19.15) v1@22.884,-19.095 ; 23.006,-21.609 cw(c24.413,-20.201) C3.2@22.423,-20.201 ; 23.174,-21.269 ccw(c21.888,-22.555) C3.2@21.888,-20.736 ; 23.983,-22.296 24.14,-22.454 ; 24.14,-22.504 24.409,-22.504 ; 29.235,-22.708 29.54,-22.708 ; 30.048,-22.708 30.074,-22.708 30.328,-22.454 32.461,-20.32 ; 30.175,-22.708 32.664,-20.218 ; 30.328,-22.504 30.048,-22.504 24.409,-22.504 ; 32.461,-20.65 32.461,-20.32 ; 32.639,-19.914 32.664,-19.914 ; 33.503,-13.712 cw(c34.159,-13.712) v2@33.695,-13.248 ; 33.503,-13.665 33.503,-13.818 ; 33.503,-13.467 ccw(c33.193,-13.467) 33.412,-13.248 cw(c32.795,-13.865) 33.668,-13.865 ; 33.67,-18.654 33.757,-18.567 33.757,-18.313 ; 33.884,-17.907 33.884,-17.539 34.201,-17.221 ; 34.188,-17.12 34.188,-14.859 ; 34.265,-17.323 34.265,-17.069 34.265,-14.884 34.265,-14.681 ; C3.2@21.888,-20.736 cw(c21.888,-22.028) 22.801,-21.114 cw(c23.714,-20.201) C3.2@22.423,-20.201 ; C3.2 22.106,-20.201 24.409,-22.504 ; C3.2 21.888,-20.491 24.105,-22.708 24.394,-22.708 ; C3.2 C3.2@21.888,-20.022 ; C3.2 C3.2@22.147,-19.942 ; C3.2 24.394,-22.708 ; C3.2@21.888,-20.022 C3.2@21.888,-19.667 ; C3.2@21.888,-20.022 22.428,-19.482 ; C3.2@21.888,-19.667 21.888,-19.413 v2@22.174,-19.126 ; C3.2@21.888,-19.667 22.073,-19.482 ; 22.073,-19.482 22.428,-19.482 ; 22.073,-19.482 v2(22.428,-19.126) ; C3.2@22.147,-19.942 22.298,-19.942 22.809,-19.431 ; C3.2@22.147,-19.942 22.428,-19.661 ; v2@22.174,-19.126 22.454,-18.847 22.555,-18.847 ; v2@22.174,-19.126 v2(22.428,-19.126) ; 22.428,-19.66 22.428,-19.482 ; 22.428,-19.66 22.631,-19.456 ; 22.428,-19.482 v2(22.428,-19.126) ; 22.555,-18.847 22.631,-18.923 22.631,-19.456 ; 22.555,-18.847 22.809,-18.847 ; 22.631,-19.456 v1@22.809,-19.279 ; 22.809,-19.431 22.987,-19.253 22.987,-18.847 22.809,-18.847 ; 22.809,-19.431 v1@22.809,-19.279 ; v1@22.809,-19.279 22.809,-18.847 ; 24.394,-22.708 29.54,-22.708 ; 29.54,-22.708 30.404,-22.708 32.664,-20.447 ; 32.461,-20.32 32.461,-19.609 ; 32.461,-19.609 33.757,-18.313 ; 32.461,-19.609 32.461,-19.583 33.884,-18.161 ; 32.461,-19.609 33.757,-18.313 ; 32.664,-20.447 32.664,-20.218 ; 32.664,-20.447 32.868,-20.244 32.868,-19.456 ; 32.664,-20.218 32.664,-19.66 32.868,-19.456 ; 32.868,-19.456 33.884,-18.44 ; 33.503,-13.919 33.503,-14.224 34.138,-14.859 34.265,-14.986 34.265,-14.808 ; 33.503,-13.919 33.668,-14.084 ; 33.503,-13.919 33.503,-13.818 ; 33.503,-13.818 33.503,-14.046 34.265,-14.808 ; 33.503,-13.818 33.503,-13.005 33.668,-13.17 33.668,-14.084 ; 33.668,-14.084 34.201,-14.618 ; 33.757,-18.313 33.757,-18.11 33.757,-17.501 34.138,-17.12 34.138,-17.45 33.884,-17.704 ; 33.884,-18.44 33.884,-18.161 ; 33.884,-18.44 34.036,-18.288 34.036,-17.551 ; 33.884,-18.161 33.884,-17.704 ; 33.884,-17.704 34.036,-17.551 ; 34.036,-17.551 34.201,-17.386 34.201,-17.221 ; 34.201,-17.221 34.201,-14.618 ; 34.201,-14.618 34.265,-14.681 ; 34.201,-14.618 34.265,-14.681 ; 34.265,-14.808 34.265,-14.681
  other v1: 22.835,-19.101
W: U1.4 W.1 | length 24.1
  Top Layer w0.22: W.1@29.678,-9.551 ccw(c30.255,-9.345) 30.255,-9.957 ; W.1@30.083,-9.38 ccw(c30.559,-9.148) 30.559,-9.677 ; W.1@30.089,-9.392 ccw(c30.708,-9.133) 30.708,-9.804 ; W.1@30.093,-9.403 ccw(c30.879,-9.122) 30.879,-9.957 ; W.1@30.197,-9.788 cw(c30.463,-10.055) 30.463,-9.677 ; W.1@30.204,-9.781 cw(c30.914,-10.459) 30.914,-9.477 ; W.1@30.204,-9.173 ccw(c30.914,-8.494) 30.914,-9.477 ; W.1@30.281,-9.284 ccw(c30.912,-8.975) 30.912,-9.677 ; W.1@30.292,-9.307 ccw(c31.039,-8.994) 31.039,-9.804 ; W.1@30.3,-9.329 ccw(c31.191,-9.011) 31.191,-9.957 ; 30.378,-9.804 cw(c30.378,-9.271) W.1 ; 30.567,-9.957 cw(c30.567,-9.233) W.1 ; U1.4 32.797,-12.364 32.969,-12.192 ; U1.4@32.641,-12.35 ccw(c32.706,-12.125) 32.871,-12.29 32.969,-12.192 ; U1.4@32.642,-12.29 32.817,-12.116 ; U1.4@32.652,-12.364 cw(c32.855,-12.364) 32.712,-12.221 ; 32.727,-11.493 32.817,-11.582 32.817,-12.116 ; W.1 29.997,-9.588 29.997,-9.957 31.191,-9.957 ; W.1 30.213,-9.804 31.039,-9.804 ; W.1 30.086,-9.677 30.912,-9.677 ; W.1 30.914,-9.477 ; 30.912,-9.677 31.039,-9.804 ; 30.914,-9.477 32.969,-11.532 32.969,-11.735 ; 31.039,-9.804 31.191,-9.957 ; 31.191,-9.957 32.969,-11.735 ; 32.817,-12.116 32.969,-11.963 ; 32.969,-12.192 32.969,-11.963 ; 32.969,-11.963 32.969,-11.735 ; U1.4@32.637,-12.349 ccw(c32.637,-11.927) 32.936,-12.225 cw(c32.637,-11.927) U1.4@32.637,-12.349
pads on no net: U2.1 U2.4 U2.7 U2.8 U2.9 U2.10 U2.11 U2.17 U2.25 U2.26 U2.27 U2.28

## Polygon pours and split planes (outlines as drawn)
GND on Top Layer "Top Layer-No Net" (solid, remove dead copper, pour order 0): 17.45,-7.214 17.628,-7.391 17.628,-26.848 37.287,-26.848 37.846,-26.289 37.846,-6.68
GND on Bottom Layer "Top Layer-No Net" (solid, remove dead copper, pour order 1): 17.323,-7.544 17.323,-25.984 17.348,-26.01 17.628,-26.289 38.024,-26.289 38.024,-7.391 36.678,-6.045

## Keep-outs
Keep-Out Layer:
  circle w0.05: c20.093,-15.977 r1
  circle w0.05: c32.993,-15.977 r0.95
  circle w0.05: c32.977,-17.958 r0.5
  circle w0.05: c20.074,-14.021 r0.5
  lines w0.1: 22.601,-23.052 cw(c26.543,-15.977) 24.031,-8.276 24.031,-9.555 ; 22.657,-23.063 30.531,-23.038 ; 24.031,-9.55 cw(c26.543,-15.977) 29.035,-9.542 ; 29.011,-8.262 cw(c26.543,-15.977) 30.518,-23.034 ; 29.032,-9.542 29.032,-8.276

## Other copper
Top Layer:
  rectangle net PGND: 31.037,-11.405 31.801,-10.923
  rectangle net PGND: 30.91,-11.074 31.242,-10.516
  pour cut-out: 30.505,-14.338 30.531,-17.018 29.159,-17.043 29.185,-19.075 31.801,-18.999 31.801,-14.351 31.826,-14.326
Bottom Layer:
  rectangle net PGND: 29.083,-11.565 31.928,-10.643
  pour cut-out: 30.505,-14.338 30.531,-17.018 29.159,-17.043 29.185,-19.075 31.801,-18.999 31.801,-14.351 31.826,-14.326

## Silkscreen, mask and mechanical layers (free items; w line width, h text height)
Bottom Overlay:
  text "LKS_M072_V1.0" at 28.931,-22.657 h0.6
Mechanical 15:
  lines w0.025: 26.543,-25.756 26.543,-7.214
  lines w0.127: 24.422,-13.855 26.543,-15.977 ; 26.53,-15.989 28.664,-13.855